# EAGLE board Arm Board V4 (EAGLE 6.5.0)
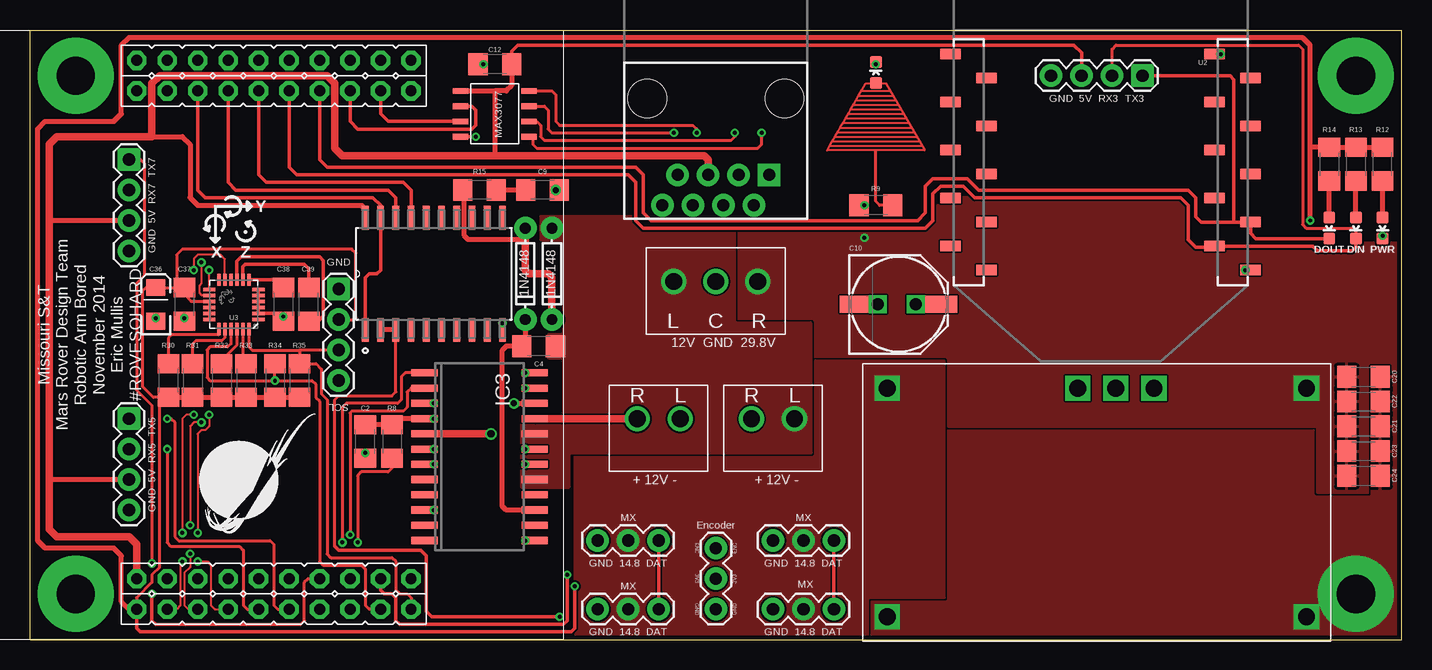
[diagram p0: board, top side]
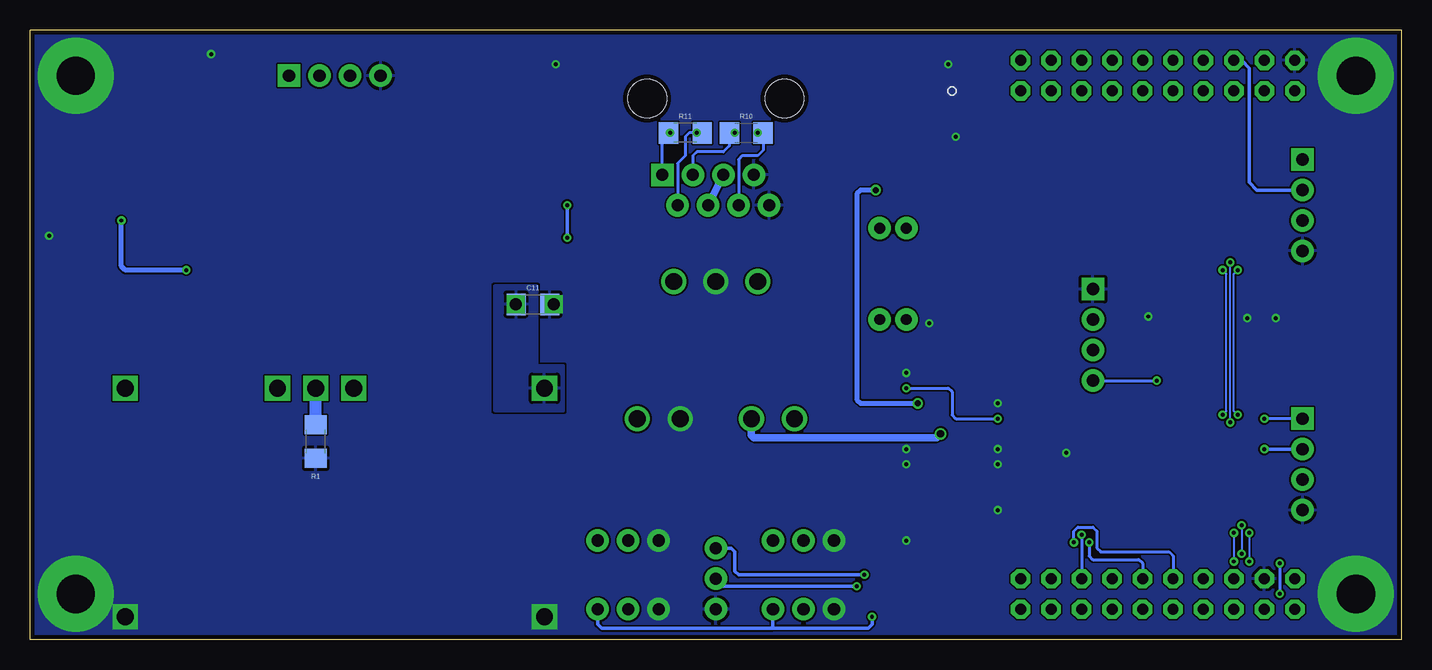
[diagram p1: board, bottom side, seen from below]

Size 114.3 x 50.8 mm. Coordinates in mm from the lower left corner, seen from the top.
Outline: 114.3,0 114.3,50.8 0,50.8 0,0 114.3,0
Copper layers (1*16): Top 0.0356mm / dielectric 1.5011mm / Bottom 0.0356mm
Design rules "LaenPCBOrder": minimum track width 6mil, minimum drill 13mil, track to track 6mil, track to pad 6mil, pad to pad 6mil, via to via 6mil, smd to smd 6mil, copper to edge 15mil, drill to drill 6mil, minimum pad ring 7mil, minimum via ring 7mil, stop-mask expansion 3mil, vias tented up to drill 0mil, thermal gap 10mil
Net classes: 1 USB: drill 0.406 mm, clearance 0.203 mm to class 0, clearance 0.406 mm; 3 usbvcc: width 0.61 mm, drill 0.508 mm, clearance 0.203 mm to class 0, clearance 0.254 mm
tRestrict: area 15.7,26.7 to 18.2,29.2

## Footprints (pad centres in the part's own frame; a part is rotated, then mirrored left to right if it is on the bottom)
1206 = smd 1.6 x 1.8: 1 -1.4,0; 2 1.4,0
PANASONIC_E = smd 3.8 x 1.4: + 3,0; - -3,0
EIA3216 = smd 1.4 x 1.6: A 1.4,0; C -1.4,0
DIODE-1N4148 = drill 0.9 pad 1.88: A -3.81,0; C 3.81,0
SO24 = smd 0.6 x 2.2: 1 -6.985,-4.6; 2 -5.715,-4.6; 3 -4.445,-4.6; 4 -3.175,-4.6; 5 -1.905,-4.6; 6 -0.635,-4.6; 7 0.635,-4.6; 8 1.905,-4.6; 9 3.175,-4.6; 10 4.445,-4.6; 11 5.715,-4.6; 12 6.985,-4.6; 13 6.985,4.6; 14 5.715,4.6; 15 4.445,4.6; 16 3.175,4.6; 17 1.905,4.6; 18 0.635,4.6; 19 -0.635,4.6; 20 -1.905,4.6; 21 -3.175,4.6; 22 -4.445,4.6; 23 -5.715,4.6; 24 -6.985,4.6
1X04 = drill 1.016 pad 1.88 square: 1 0,0 | drill 1.016 pad 1.88: 2 2.54,0; 3 5.08,0; 4 7.62,0
1X03 = drill 1.016 pad 1.88: 1 0,0; 2 2.54,0; 3 5.08,0
LED-0603 = smd 1 x 1: A 0,-0.877; C 0,0.877
LAUNCHPAD-XL = drill 0.914 pad 1.6 octagon: 3.3V 30.48,2.54; GND1 33.02,5.08; GND2 30.48,48.26; PA2 53.34,48.26; PA3 50.8,48.26; PA4 48.26,48.26; PA5 48.26,2.54; PA6 50.8,2.54; PA7 53.34,2.54; PB0 35.56,2.54; PB1 38.1,2.54; PB2 33.02,48.26; PB3 35.56,45.72; PB4 45.72,2.54; PB5 33.02,2.54; PB6 45.72,48.26; PB7 43.18,48.26; PC4 38.1,45.72; PC5 40.64,45.72; PC6 43.18,45.72; PC7 45.72,45.72; PD0 35.56,5.08; PD1 38.1,5.08; PD2 40.64,5.08; PD3 43.18,5.08; PD6 48.26,45.72; PD7 50.8,45.72; PE0 35.56,48.26; PE1 45.72,5.08; PE2 48.26,5.08; PE3 50.8,5.08; PE4 40.64,2.54; PE5 43.18,2.54; PF0 38.1,48.26; PF1 53.34,5.08; PF2 30.48,45.72; PF3 33.02,45.72; PF4 53.34,45.72; RST 40.64,48.26; VBUS 30.48,5.08
STANDOFF-ELECTRICAL = drill 3.2 pad 6.35: P1 0,0
SOIC127P1030X265-20N = smd 1.981 x 0.559: 1 -4.674,5.715; 2 -4.674,4.445; 3 -4.674,3.175; 4 -4.674,1.905; 5 -4.674,0.635; 6 -4.674,-0.635; 7 -4.674,-1.905; 8 -4.674,-3.175; 9 -4.674,-4.445; 10 -4.674,-5.715; 11 4.674,-5.715; 12 4.674,-4.445; 13 4.674,-3.175; 14 4.674,-1.905; 15 4.674,-0.635; 16 4.674,0.635; 17 4.674,1.905; 18 4.674,3.175; 19 4.674,4.445; 20 4.674,5.715
XBEE-SMD = smd 1.7 x 0.85: 1 -12.5,20; 2 -9.5,18; 3 -12.5,16; 4 -9.5,14; 5 -12.5,12; 6 -9.5,10; 7 -12.5,8; 8 -9.5,6; 9 -12.5,4; 10 -9.5,2; 11 12.5,2; 12 9.5,4; 13 12.5,6; 14 9.5,8; 15 12.5,10; 16 9.5,12; 17 12.5,14; 18 9.5,16; 19 12.5,18; 20 9.5,20
LGA-24 = smd 1.016 x 0.29: 1 -2.053,1.25; 2 -2.053,0.75; 3 -2.053,0.25; 4 -2.053,-0.25; 5 -2.053,-0.75; 6 -2.053,-1.25; 13 2.053,-1.25; 14 2.053,-0.75; 15 2.053,-0.25; 16 2.053,0.25; 17 2.053,0.75; 18 2.053,1.25 | smd 0.29 x 1.016: 7 -1.25,-2.053; 8 -0.75,-2.053; 9 -0.25,-2.053; 10 0.25,-2.053; 11 0.75,-2.053; 12 1.25,-2.053; 19 1.25,2.053; 20 0.75,2.053; 21 0.25,2.053; 22 -0.25,2.053; 23 -0.75,2.053; 24 -1.25,2.053
R_PDSS-T7 = drill 1.4 square: 1 -17.47,9.53; 2 -17.47,-9.52; 3 -4.77,-9.52; 4 -1.59,-9.52; 5 1.59,-9.52; 6 17.47,-9.52; 7 17.47,9.53
RJ45-8 = drill 1 pad 1.88 square: 1 -4.445,6.35 | drill 1 pad 1.88: 2 -3.175,8.89; 3 -1.905,6.35; 4 -0.635,8.89; 5 0.635,6.35; 6 1.905,8.89; 7 3.175,6.35; 8 4.445,8.89 | hole 3.2: -5.715,0; 5.715,0
MAX3070E = smd 0.49 x 1.3: A -1.905,2.857; B -0.635,2.857; DI 0.635,-2.857; GND 1.905,-2.857; RO -0.635,-2.857; VCC -1.905,-2.857; Y 1.905,2.857; Z 0.635,2.857
691322110003 = drill 1.4: C 0,0; L -3.5,0; R 3.5,0
691321100002 = drill 1.4: L -1.79,0; R 1.79,0

## Placement (x,y rotation side)
C2  5.6nF  [1206]  27.94,16.51 90 top
C4  220nF  [1206]  42.39,24.45 180 top
C9  10nF  [1206]  42.7,37.47 180 top
C10  330uF  [PANASONIC_E]  72.39,27.94 0 top
C11  1.0uF  [1206]  72.39,27.94 0 bottom
C12  .1uF  [1206]  38.73,47.94 180 top
C20  1.0uF  [1206]  111.12,21.91 0 top
C21  4.7uF  [1206]  111.12,17.78 0 top
C22  4.7uF  [1206]  111.12,19.84 0 top
C23  4.7uF  [1206]  111.12,15.72 0 top
C24  4.7uF  [1206]  111.12,13.65 0 top
C36  10uF  [EIA3216]  10.48,27.94 90 top
C37  1uF  [1206]  12.86,27.94 270 top
C38  4.7uF  [1206]  21.11,27.94 270 top
C39  .22uF  [1206]  23.24,27.94 90 top
D1  1N4148  [DIODE-1N4148]  41.27,30.48 270 top
D2  1N4148  [DIODE-1N4148]  43.5,30.48 270 top
IC3  L6206D  [SO24]  37.47,15.24 270 top
JP1  [1X04]  92.71,46.99 180 top
JP2  [1X04]  8.26,40.01 270 top
JP3  [1X04]  8.26,18.41 270 top
JP4  [1X04]  25.72,29.21 270 top
JP7  [1X03]  57.15,2.54 90 top
JP9  [1X03]  61.91,2.54 0 top
JP10  [1X03]  47.31,2.54 0 top
JP11  [1X03]  61.91,8.26 0 top
JP12  [1X03]  47.31,8.26 0 top
LED1  RED  [LED-0603]  112.71,34.29 180 top
LED2  RED  [LED-0603]  110.49,34.29 180 top
LED3  GREEN  [LED-0603]  108.27,34.29 180 top
LED5  RED  [LED-0603]  70.48,47.24 0 top
P1  STELLARIS-LAUNCHPADSTELLARIS-LAUNCHPAD-XL  [LAUNCHPAD-XL]  -21.59,0 0 top
R1  17.2k  [1206]  90.49,16.51 90 bottom
R8  100k  [1206]  30.16,16.51 270 top
R9  1.5k  [1206]  70.48,36.2 180 top
R10  120 Ohm  [1206]  54.61,42.23 0 bottom
R11  120 Ohm  [1206]  59.69,42.23 180 bottom
R12  1k  [1206]  112.71,39.62 90 top
R13  1k  [1206]  110.49,39.62 270 top
R14  1k  [1206]  108.27,39.62 270 top
R15  100  [1206]  37.47,37.47 180 top
R30  10k  [1206]  11.53,21.59 270 top
R31  10k  [1206]  13.56,21.59 270 top
R32  10k  [1206]  15.97,21.59 270 top
R33  10k  [1206]  18,21.59 270 top
R34  10k  [1206]  20.42,21.59 270 top
R35  10k  [1206]  22.45,21.59 270 top
S1  STANDOFF_ELECTRICAL  [STANDOFF-ELECTRICAL]  3.81,3.81 0 top
S2  STANDOFF_ELECTRICAL  [STANDOFF-ELECTRICAL]  3.81,46.99 0 top
S3  STANDOFF_ELECTRICAL  [STANDOFF-ELECTRICAL]  110.49,3.81 0 top
S4  STANDOFF_ELECTRICAL  [STANDOFF-ELECTRICAL]  110.49,46.99 0 top
U1  SN74LS241DW  [SOIC127P1030X265-20N]  33.66,30.48 90 top
U2  XBEE-1B3  [XBEE-SMD]  89.22,50.8 180 top
U3  LSM9DS0  [LGA-24]  16.99,27.94 180 top
U$2  Q_PTN78020  [R_PDSS-T7]  88.9,11.43 180 top
U$3  RJ45-8PTH  [RJ45-8]  57.15,45.09 180 top
U$4  MAX3077  [MAX3070E]  38.73,43.81 270 top
U$5  691321100003  [691322110003]  57.15,29.84 0 top
U$6  H_WR-TBL_321*0002VERT  [691321100002]  52.39,18.41 180 top
U$7  H_WR-TBL_321*0002VERT  [691321100002]  61.91,18.41 180 top

## Library data of the parts
C2 C4 C9 R1 R9-R14 = SparkFun-Passives
C10 C12 C21-C24 C37-C39 = SparkFun-Capacitors
C11 C20 = SparkFun-Capacitors; PROD_ID: CAP-09822
C36 = SparkFun-Capacitors; PROD_ID: CAP-00811
D1 D2 = SparkFun-DiscreteSemi
IC3 = L6206D
JP1-JP4 JP7 JP9-JP12 U$3 = SparkFun-Connectors
LED1 LED2 LED5 = SparkFun-LED; PROD_ID: DIO-00819
LED3 = SparkFun-LED; PROD_ID: DIO-00821
P1 = StellarisLaunchPad_Fred
R8 R15 R30-R35 = SparkFun-Resistors
S1-S4 = SparkFun-Electromechanical
U1 = 74LS241; MPN: SN74LS241DW; OC_FARNELL: 1739687; OC_NEWARK: 50R6539; PACKAGE: SOIC-20; SUPPLIER: Texas Instruments
U2 = SparkFun
U3 = SparkFun-DigitalIC
U$2 = MRDT-2014-All
U$4 = MAX3077
U$5 = MRDT-2015-PowerBoard
U$6 U$7 = MRDT-2015-PowerBoard; DIGIKEY_PN: 732-2763-ND

## Nets
14.8V: C10.+ C11.1 JP9.2 JP10.2 JP11.2 JP12.2 U$2.6
+3V3: C36.A C37.1 JP4.2 JP7.2 P1.3.3V R12.2 R13.1 R14.1 R30.2 R31.2 R32.2 R33.2 R34.2 R35.2 U2.1 U3.15 U3.16 U3.17 U3.18
+5V: C12.1 JP1.3 JP2.3 JP3.3 P1.VBUS U1.20 U$3.4 U$3.5 U$4.VCC
+12V: C4.1 D2.A IC3.17 IC3.20 U$5.L U$7.L
A1: IC3.5 U$6.L
A2: IC3.21 U$6.R
CS_G: R30.1 U3.19
CS_XM: R31.1 U3.20
CTS: U2.12
DC_1: P1.PB3 U1.1 U1.19
DDATA_1: JP9.3 JP10.3 JP11.3 JP12.3 U1.2 U1.3
DEN_G: U3.10
DIO0: U2.20
DIO1: U2.19
DIO2: U2.18
DIO3: U2.17
DIO4: U2.11
DIO5: U2.15
DIO9: U2.13
DIO11: U2.7
DIO12: U2.4
DRDY_G: U3.12
DTR: U2.9
EN_A: P1.PD2 R8.2
GND: C2.1 C10.- C11.2 C12.2 C20.2 C21.2 C22.2 C23.2 C24.2 C36.C C37.2 C38.2 IC3.3 IC3.6 IC3.7 IC3.10 IC3.13 IC3.18 IC3.19 IC3.24 JP1.4 JP2.4 JP3.4 JP4.1 JP7.1 JP9.1 JP10.1 JP11.1 JP12.1 LED1.C LED5.C P1.GND1 P1.GND2 R1.1 S1.P1 S2.P1 S3.P1 S4.P1 U1.10 U2.10 U3.2 U3.3 U3.4 U3.5 U3.6 U$2.1 U$2.7 U$3.7 U$3.8 U$4.GND U$5.C U$7.R
IN1_A: IC3.1 P1.PD3
IN2_A: IC3.2 P1.PE2
INT1_XM: P1.PB1 U3.13
INT2_XM: P1.PB0 U3.14
INT_G: P1.PB5 U3.11
LA_ENC: JP7.3 P1.PE3
N$1: R11.1 U$3.2 U$4.Z
N$2: R10.2 U$3.6 U$4.B
N$3: R10.1 U$3.3 U$4.A
N$4: LED2.A R13.2
N$5: R11.2 U$3.1 U$4.Y
N$6: LED3.A R14.2
N$9: R1.2 U$2.4
N$10: C39.1 U3.9
N$11: C39.2 U3.8
N$12: C38.1 U3.7
N$14: LED5.A R9.1
N$17: D1.A D2.C R15.2
N$18: C9.2 R15.1
N$19: C9.1 IC3.22
N$38: LED1.A R12.1
OCD_A: C2.2 IC3.4 IC3.23 R8.1
RES1: U2.8
RES2: U2.14
RSSI: U2.6
RST: P1.RST
RTS: U2.16
RX_1: P1.PC4 U1.18
RX_2: P1.PD6 U$4.RO
RX_3: JP1.2 LED2.C P1.PC6 U2.2
RX_5: JP3.2 P1.PE4
RX_7: JP2.2 P1.PE0
SCL: JP4.4 P1.PA6 R34.1 U3.21
SDA: JP4.3 P1.PA7 R35.1 U3.24
SDO_G: R32.1 U3.22
SDO_XM: R33.1 U3.23
TX_1: P1.PC5 U1.17
TX_2: P1.PD7 U$4.DI
TX_3: JP1.1 LED3.C P1.PC7 U2.3
TX_5: JP3.1 P1.PE5
TX_7: JP2.1 P1.PE1
VBOOT: C4.2 D1.C IC3.15
VIN: C20.1 C21.1 C22.1 C23.1 C24.1 R9.2 U$2.2 U$5.R
XRESET: U2.5

## Tracks (layer width: path | path; a pad name or v marks a point on that pad's centre or on a via)
14.8V  (via drill 1)
  Top 0.254: v73.82,27.94 C10.+
  pour Top (rank 3, no thermals): 45.4,15.24 45.4,0 69.85,0 69.85,3.49 76.2,3.49 76.2,23.18 65.41,23.18 65.41,15.24
  pour Top (no thermals): 69.53,22.86 69.53,19.05 73.34,19.05 73.34,22.86
  pour Bottom: 69.85,22.86 69.85,19.05 75.56,19.05 75.56,29.53 72.07,29.53 72.07,22.86
+3V3  (via drill 0.33)
  Top 0.254: U3.18 U3.17 U3.16 U3.15 13.43,28.19 13.18,28.45 13.18,29.08 | P1.3.3V 8.89,3.49 10.16,4.76 10.16,5.4 10.79,6.03 10.79,20.19 10.29,20.19 9.37,21.11 9.37,29.05 9.65,29.34 C36.A C37.1 12.73,29.21 12.7,29.21 12.22,29.69 12.22,32.07 12.7,32.54 26.83,32.54 27.15,32.23 27.15,26.83 26.99,26.67 JP4.2
  Top 0.279: v45.4,4.45 45.4,0.95 45.09,0.64 9.21,0.64 8.89,0.95 P1.3.3V
  Top 0.305: 12.92,29.34 13.18,29.08 | R32.2 12.7,20.19 | R30.2 10.79,20.19
  Top 0.406: R30.2 R31.2 R32.2 R33.2 R34.2 R35.2 | R12.2 R13.1 R14.1 106.68,41.02 | v106.68,34.92 106.68,41.02 | 106.68,41.02 106.68,49.53 106.05,50.16 8.26,50.16 7.62,49.53 7.62,43.81 6.99,43.18 1.27,43.18 0.64,42.55 0.64,8.26 1.27,7.62 6.99,7.62 7.62,6.99 7.62,3.17 8.26,2.54 P1.3.3V | U2.1 v101.28,30.8
  Top 0.457: 12.92,29.34 C37.1
  Bottom 0.279: v45.4,4.45 56.52,4.45 JP7.2
  Bottom 0.406: v101.28,30.8 106.36,30.8 106.68,31.11 v106.68,34.92
+5V
  Top 0.305: C12.1 40.13,49.02 40.64,49.53 87,49.53 87.63,48.9 JP1.3
  Top 0.406: U$4.VCC 38.73,45.72 | 38.73,45.72 38.73,40.32 | C12.1 40.13,46.17 39.69,45.72 38.73,45.72 | U1.20 27.94,35.88 27.62,36.2 13.97,36.2 13.34,36.83 13.34,41.27 12.7,41.91 10.16,41.91 | JP3.3 1.59,13.34 | JP2.3 1.59,34.92
  Top 0.61: U$3.5 56.52,40.01 56.2,40.32 38.73,40.32 26.04,40.32 25.4,40.96 25.4,46.35 24.77,46.99 10.79,46.99 10.16,46.35 10.16,41.91 2.22,41.91 1.59,41.27 1.59,34.92 1.59,13.34 1.59,9.21 2.22,8.57 8.26,8.57 8.89,7.94 P1.VBUS
  Bottom 0.61: U$3.5 U$3.4
+12V
  Top 0.61: C4.1 44.13,24.45
  pour Top (rank 2, no thermals): 58.74,35.24 42.55,35.24 42.55,33.34 44.45,33.34 44.45,25.4 43.18,25.4 43.18,23.5 44.45,23.5 44.45,15.56 65.09,15.56 65.09,26.35 58.74,26.35
  pour Top (rank 2, no thermals): 40.96,18.41 40.96,12.7 44.93,12.7 44.93,16.19 48.9,16.19 48.9,18.41
A1  (via drill 0.6)
  Top 0.61: IC3.5 v38.42,17.14
  Bottom 0.61: v38.42,17.14 38.73,16.83 53.98,16.83 54.18,17.03 U$6.L
A2
  Top 0.61: IC3.21 U$6.R
CS_G
  Top 0.254: U3.19 15.74,25.55 15.72,25.4 11.78,25.4 11.53,25.15 R30.1
CS_XM
  Top 0.254: R31.1 13.56,24.64 13.81,24.89 15.97,24.89 16.24,25.16 U3.20
DC_1
  Top 0.305: P1.PB3 13.97,37.47 14.61,36.83 28.57,36.83 29.21,36.2 U1.19 29.21,30.8 28.89,30.48 28.26,30.48 27.94,30.16 U1.1 27.94,25.24
DDATA_1  (via drill 0.33)
  Top 0.254: 25.4,7.78 25.4,20 25.72,20.32 30.16,20.32 30.48,20.64 U1.3
  Top 0.279: v44.13,1.91 33.5,1.91 33.02,2.38 33.02,6.99 32.54,7.46 25.72,7.46 25.4,7.78 | JP12.3 JP10.3 | JP11.3 JP9.3
  Top 0.406: U1.2 U1.3 30.48,26.35
  Bottom 0.279: JP10.3 52.39,0.95 | 52.39,0.95 66.67,0.95 66.99,1.27 JP9.3 | 52.39,0.95 44.45,0.95 44.13,1.27 v44.13,1.91
EN_A  (via drill 0.33)
  Top 0.254: R8.2 30.16,14.29 29.84,13.97 27.62,13.97 27.3,13.65 v27.3,8.1
  Bottom 0.254: v27.3,8.1 27.3,9.05 26.99,9.37 25.72,9.37 25.4,9.05 25.4,7.62 25.08,7.3 19.37,7.3 19.05,6.99 P1.PD2
GND  (via drill 0.33, 1)
  Top 0.254: v70.48,47.94 LED5.C | v70.64,27.94 C10.-
  Top 0.305: U3.6 U3.5 U3.4 U3.3 U3.2 21.16,27.19 v21.11,26.92 C38.2 | C36.C v10.48,26.8 | v12.86,26.8 C37.2 | v37.78,47.94 37.4,47.88 C12.2 | U$4.GND v37.15,41.91 | v33.66,15.88 IC3.6 | v33.66,14.61 IC3.7 | v33.66,10.79 IC3.10 | v41.27,8.26 IC3.13 | v41.27,14.61 IC3.18 | v41.27,15.88 IC3.19 | IC3.3 v33.66,19.68 | IC3.24 v41.27,22.23 | v39.37,26.35 U1.10
  Top 0.406: 99.06,48.8 U2.10 98.09,48.79 v99.21,48.79 | v112.71,33.66 LED1.C | v27.94,15.56 C2.1
  pour Bottom (isolate 0.152, rank 3): -2.54,-2.54 -2.54,53.34 116.84,53.34 116.84,-2.54
  pour Bottom (rank 2, no thermals): 45.72,0 55.88,0 55.88,3.81 58.42,3.81 58.42,0 68.58,0 68.58,33.02 45.72,33.02
  pour Bottom (no thermals): 70.17,3.17 70.17,0 107.63,0 107.63,3.17
  pour Top (rank 6): 76.52,17.46 76.52,3.17 70.17,3.17 70.17,0 114.3,0 114.3,17.46
  pour Bottom (no thermals): 0,7.3 0,0 7.62,0 7.62,7.3
  pour Bottom (no thermals): 0,50.8 0,43.5 7.62,43.5 7.62,50.8
  pour Top (no thermals): 70.17,0 70.17,3.17 107.63,3.17 107.63,0
  pour Bottom (no thermals): 107,7.3 107,0 114.3,0 114.3,7.3
  pour Bottom (no thermals): 107,50.8 107,43.5 114.3,43.5 114.3,50.8
  pour Top (no thermals): 107,7.3 107,0 114.3,0 114.3,7.3
  pour Top (rank 4): 112.08,11.11 111.92,22.07 114.3,22.07 114.3,11.11
IN1_A  (via drill 0.33)
  Top 0.254: IC3.1 31.27,22.23 30.96,21.91 30.96,20 30.64,19.68 26.35,19.68 26.04,19.37 v26.04,8.1
  Bottom 0.254: v26.04,8.1 26.04,6.99 25.72,6.67 21.91,6.67 21.59,6.35 P1.PD3
IN2_A  (via drill 0.33)
  Top 0.254: IC3.2 31.75,20.95 31.43,20.64 31.43,19.37 31.11,19.05 26.83,19.05 26.67,18.89 v26.67,8.73
  Bottom 0.254: v26.67,8.73 P1.PE2
INT1_XM  (via drill 0.33)
  Top 0.152: U3.13 14.92,29.53 v14.92,30.8 | v14.92,18.73 14.92,17.78 14.61,17.46 14.29,17.46 13.97,17.14 v13.97,8.89 | v13.97,6.51 14.76,6.51 15.08,6.19 15.08,2.86 15.4,2.54 P1.PB1
  Top 0.178: U3.13
  Bottom 0.152: v14.92,18.73 14.61,19.05 14.61,30.48 v14.92,30.8 | v13.97,8.89 v13.97,6.51
INT2_XM  (via drill 0.33)
  Top 0.152: v14.29,31.43 14.29,29.69 14.13,29.53 14.13,28.89 14.33,28.69 U3.14 | v14.29,18.1 13.65,18.1 13.34,17.78 v13.34,9.53 | v13.34,7.14 13.34,6.03 12.86,5.56 12.86,2.86 13.18,2.54 P1.PB0
  Bottom 0.152: v14.29,18.1 v14.29,31.43 | v13.34,9.53 v13.34,7.14
INT_G  (via drill 0.33)
  Top 0.152: U3.11 16.24,31.71 15.88,32.07 13.97,32.07 13.65,31.75 v13.65,30.8 | v13.65,18.73 13.02,18.73 12.7,18.41 v12.7,8.89 | P1.PB5 12.22,2.54 12.54,2.86 12.54,6.35 v12.7,6.51
  Bottom 0.152: v13.65,18.73 13.97,19.05 13.97,30.48 v13.65,30.8 | v12.7,8.89 v12.7,6.51
LA_ENC  (via drill 0.33)
  Top 0.279: P1.PE3 29.21,4.13 29.53,3.81 30.16,3.81 30.48,3.49 30.48,1.59 30.8,1.27 44.45,1.27 44.77,1.59 v44.77,5.4
  Bottom 0.279: v44.77,5.4 55.24,5.4 55.56,5.71 55.56,7.3 55.88,7.62 JP7.3
N$1  (via drill 0.33)
  Top 0.254: v58.74,42.23 58.74,41.91 58.42,41.59 42.86,41.59 42.55,41.91 42.55,42.86 42.23,43.18 U$4.Z
  Bottom 0.254: R11.1 59.37,42.23 59.69,41.91 59.69,40.32 60.33,39.69 U$3.2
  Bottom 0.305: v58.74,42.23 R11.1
N$2  (via drill 0.33)
  Top 0.254: U$4.B 42.86,44.45 43.18,44.13 43.18,42.55 43.5,42.23 v53.66,42.23
  Bottom 0.254: R10.2 53.21,40.77 53.66,40.32 54.93,40.32 55.24,40.01 U$3.6
  Bottom 0.305: v53.66,42.23 R10.2
N$3  (via drill 0.33)
  Top 0.254: v55.56,42.23 55.56,42.55 55.24,42.86 44.13,42.86 43.81,43.18 43.81,45.4 43.5,45.72 U$4.A
  Bottom 0.254: R10.1 56.01,41.15 56.52,40.64 58.74,40.64 59.05,40.32 U$3.3
  Bottom 0.305: v55.56,42.23 R10.1
N$4
  Top 0.406: LED2.A R13.2
N$5  (via drill 0.33)
  Top 0.254: v60.96,42.23 60.96,41.27 60.64,40.96 42.23,40.96 41.91,41.27 41.91,41.91 U$4.Y
  Bottom 0.254: U$3.1 61.59,41.41 R11.2
  Bottom 0.305: v60.96,42.23 60.96,42.1 R11.2
N$6
  Top 0.406: LED3.A R14.2
N$9
  Bottom 1.016: R1.2 U$2.4
N$10
  Top 0.305: U3.9 17.24,31.52 17.62,31.91 24.13,31.91 24.45,31.59 24.45,26.99 24,26.54 C39.1
N$11
  Top 0.305: U3.8 17.74,31.07 17.94,31.27 22.86,31.27 23.24,30.89 C39.2
N$12
  Top 0.305: U3.7 20.62,29.99 C38.1
N$14
  Top 0.152: LED5.A 70.48,46.35 | 70.48,46.35 71.32,46.35 74.55,40.77 70.48,40.77 66.42,40.77 66.7,41.26 | 66.7,41.26 66.92,41.63 | 66.92,41.63 67.11,41.95 | 67.11,41.95 67.34,42.35 | 67.34,42.35 67.53,42.69 | 67.53,42.69 67.76,43.09 | 67.76,43.09 67.98,43.46 | 67.98,43.46 68.22,43.88 | 68.22,43.88 68.4,44.2 | 68.4,44.2 68.63,44.59 | 68.63,44.59 68.85,44.98 | 68.85,44.98 69.07,45.35 | 69.07,45.35 69.31,45.77 | 69.31,45.77 69.65,46.35 70.48,46.35 | 72.52,44.2 68.45,44.2 68.4,44.2 | 72.77,43.81 68.2,43.81 68.22,43.88 | 72.96,43.43 68.01,43.43 67.98,43.46 | 73.22,43.05 67.75,43.05 67.76,43.09 | 73.41,42.67 67.56,42.67 67.53,42.69 | 73.66,42.29 67.31,42.29 67.34,42.35 | 73.85,41.91 67.12,41.91 67.11,41.95 | 74.04,41.53 66.93,41.53 66.92,41.63 | 74.3,41.15 66.67,41.15 66.7,41.26 | 72.33,44.58 68.64,44.58 68.63,44.59 | 72.14,44.96 68.9,44.96 68.85,44.98 | 71.88,45.34 69.09,45.34 69.07,45.35 | 71.69,45.72 69.3,45.72 69.31,45.77
  Top 0.254: R9.1 70.8,36.2 70.48,36.51 70.48,40.77
N$17
  Top 0.406: 41.27,33.34 36.51,33.34 36.2,33.66 36.2,37.34 R15.2
  Top 0.61: D2.C 43.5,30.16 43.18,30.48 41.59,30.48 41.27,30.8 41.27,33.34 D1.A
N$18
  Top 0.406: C9.2 R15.1
N$19  (via drill 0.5)
  Top 0.406: C9.1 v43.81,37.47 | v40.32,19.68 IC3.22
  Bottom 0.406: v43.81,37.47 45.09,37.47 45.4,37.15 45.4,20 45.09,19.68 v40.32,19.68
N$38
  Top 0.406: LED1.A R12.1
OCD_A  (via drill 0.33)
  Top 0.305: IC3.23 v41.27,20.95 | v33.66,18.41 IC3.4
  Top 0.406: IC3.4 29.98,18.41 R8.1 C2.2
  Bottom 0.254: v41.27,20.95 37.78,20.95 37.47,20.64 37.47,18.73 37.15,18.41 v33.66,18.41
RX_1
  Top 0.305: P1.PC4 16.51,38.1 17.14,37.47 29.84,37.47 30.48,36.83 U1.18
RX_2
  Top 0.305: P1.PD6 26.67,43.18 27.3,42.55 36.83,42.55 37.15,42.86 37.15,44.13 36.83,44.45 U$4.RO
RX_3
  Top 0.254: JP1.2 90.17,49.21 90.49,49.53 105.73,49.53 106.05,49.21 106.05,34.61 106.36,34.29 110.17,34.29 110.49,33.97 LED2.C
  Top 0.305: P1.PC6 21.59,39.37 22.23,38.73 49.85,38.73 50.48,38.1 50.48,34.92 51.12,34.29 74.61,34.29 75.25,34.92 75.25,37.15 75.88,37.78 77.79,37.78 78.74,36.83 95.89,36.83 96.52,36.2 96.52,33.34 97.16,32.7 98.3,32.7 U2.2 106.9,32.8 107.31,32.38 110.17,32.38 110.49,32.7 LED2.C
RX_5  (via drill 0.33)
  Top 0.254: P1.PE4 18.1,2.54 17.78,2.86 17.78,7.46 17.46,7.78 11.75,7.78 11.43,8.1 v11.43,15.88
  Bottom 0.305: JP3.2 v11.43,15.88
RX_7
  Bottom 0.305: P1.PE0 13.34,48.26 12.7,47.62 12.7,38.1 12.06,37.47 JP2.2
SCL  (via drill 0.33)
  Top 0.254: U3.21 16.74,24.64 16.48,24.38 15.02,24.38 14.76,24.13 14.76,21.84 15.02,21.59 v20.41,21.59 | P1.PA6 28.26,2.54 27.94,2.86 27.94,5.87 27.62,6.19 24.45,6.19 24.13,6.51 24.13,19.84 23.81,20.16 23.81,21.27 23.5,21.59 v20.41,21.59 | v20.41,21.59 R34.1
  Bottom 0.254: JP4.4 v20.41,21.59
SDA
  Top 0.254: U3.24 18.24,24.4 18.51,24.13 22.47,24.13 | 22.48,23.88 22.47,23.66 | 22.47,23.66 R35.1 | R35.1 22.29,22.8 22.54,22.86 | P1.PA7 31.75,3.49 31.43,3.81 30.8,3.81 30.48,4.13 30.48,6.51 30.16,6.83 25.08,6.83 24.77,7.14 24.77,20 24.29,20.48 24.29,22.54 23.84,22.99 R35.1 | 22.47,24.13 22.47,23.66 | JP4.3 22.47,24.13
SDO_G
  Top 0.254: U3.22 17.24,24.54 16.07,23.37 16.07,23.24 R32.1
SDO_XM
  Top 0.254: U3.23 17.74,22.94 R33.1
TX_1
  Top 0.305: P1.PC5 19.05,38.73 19.68,38.1 31.11,38.1 31.75,37.47 U1.17
TX_2
  Top 0.305: P1.PD7 29.21,43.81 29.84,43.18 U$4.DI
TX_3
  Top 0.305: P1.PC7 24.13,40.01 24.77,39.37 50.48,39.37 51.12,38.73 51.12,35.56 51.75,34.92 73.98,34.92 74.61,35.56 74.61,37.78 75.25,38.42 78.11,38.42 79.06,37.47 96.52,37.47 97.16,36.83 97.16,35.24 97.6,34.8 100.33,34.8 | 100.33,34.8 U2.3 101.72,33.85 102.16,33.41 LED3.C | JP1.1 100.01,46.99 100.33,46.67 100.33,34.8
TX_5  (via drill 0.33)
  Top 0.254: P1.PE5 20.64,2.54 20.32,2.86 20.32,7.94 20,8.26 12.38,8.26 12.06,8.57 12.06,18.1 11.75,18.41 v11.43,18.41
  Bottom 0.254: JP3.1 v11.43,18.41
TX_7  (via drill 0.33)
  Top 0.254: JP2.1 9.21,40.01 9.53,39.69 9.53,30.32 8.89,29.69 8.89,20.8 10.16,19.53 v10.16,6.35 | P1.PE1 23.18,5.08 22.86,4.76 22.86,1.59 22.54,1.27 10.48,1.27 10.16,1.59
  Top 0.305: v10.16,3.81 10.16,1.59
  Bottom 0.254: v10.16,6.35 v10.16,3.81
VBOOT
  Top 0.406: IC3.15 39.69,10.79 39.37,11.11 39.37,24.13 39.69,24.45 C4.2 41.27,24.77 D1.C
  Top 0.61: 41.27,24.77 41.27,24.26 C4.2 41.12,24.45
VIN  (via drill 0.33)
  Top 0.305: R9.2 69.4,36.64 v69.53,36.2
  Bottom 0.279: v69.53,36.2 v69.53,33.5
  pour Top (no thermals): 107.95,22.73 104.58,22.73 104.58,19.18 107.95,19.18
  pour Top (rank 5): 59.05,34.29 59.05,26.67 65.41,26.67 65.41,23.5 76.52,23.5 76.52,17.78 114.3,17.78 114.3,33.02 96.52,33.02 96.52,36.83 74.61,36.83 74.61,34.29
  pour Top (no thermals): 61.91,31.62 59.5,31.62 59.5,28.07 61.91,28.07
  pour Top (rank 5): 111.44,22.86 111.44,12.22 107.31,12.22 107.31,22.86

## Text on the board
tPlace: Y | DOUT | DIN | PWR | X | Z
tNames: GND 5V RX3 TX3 | GND 5V RX7 TX7 | GND | Missouri S&T / Mars Rover Design Team / Robotic Arm Bored / November 2014 / Eric Mullis / #ROVESOHARD | 12V GND 29.8V | SCL | GND 5V RX5 TX5 | + 12V - | + 12V - | MX | Encoder | MX | ENC | ENC | GND 14.8 DAT | GND 14.8 DAT | 3V3 | 3V3 | MX | MX | GND | GND | GND 14.8 DAT | GND 14.8 DAT